# Altium PCB boost_converter_pcb_converter.PcbDoc
Units mil, origin at the board's own origin, x right, y up, seen from the top; angles counter-clockwise.
Board outline 2885.72 x 3790 mil, 2 copper layers (Top Layer, Bottom Layer); 26 components, 14 nets, 60 pads, 0 vias.
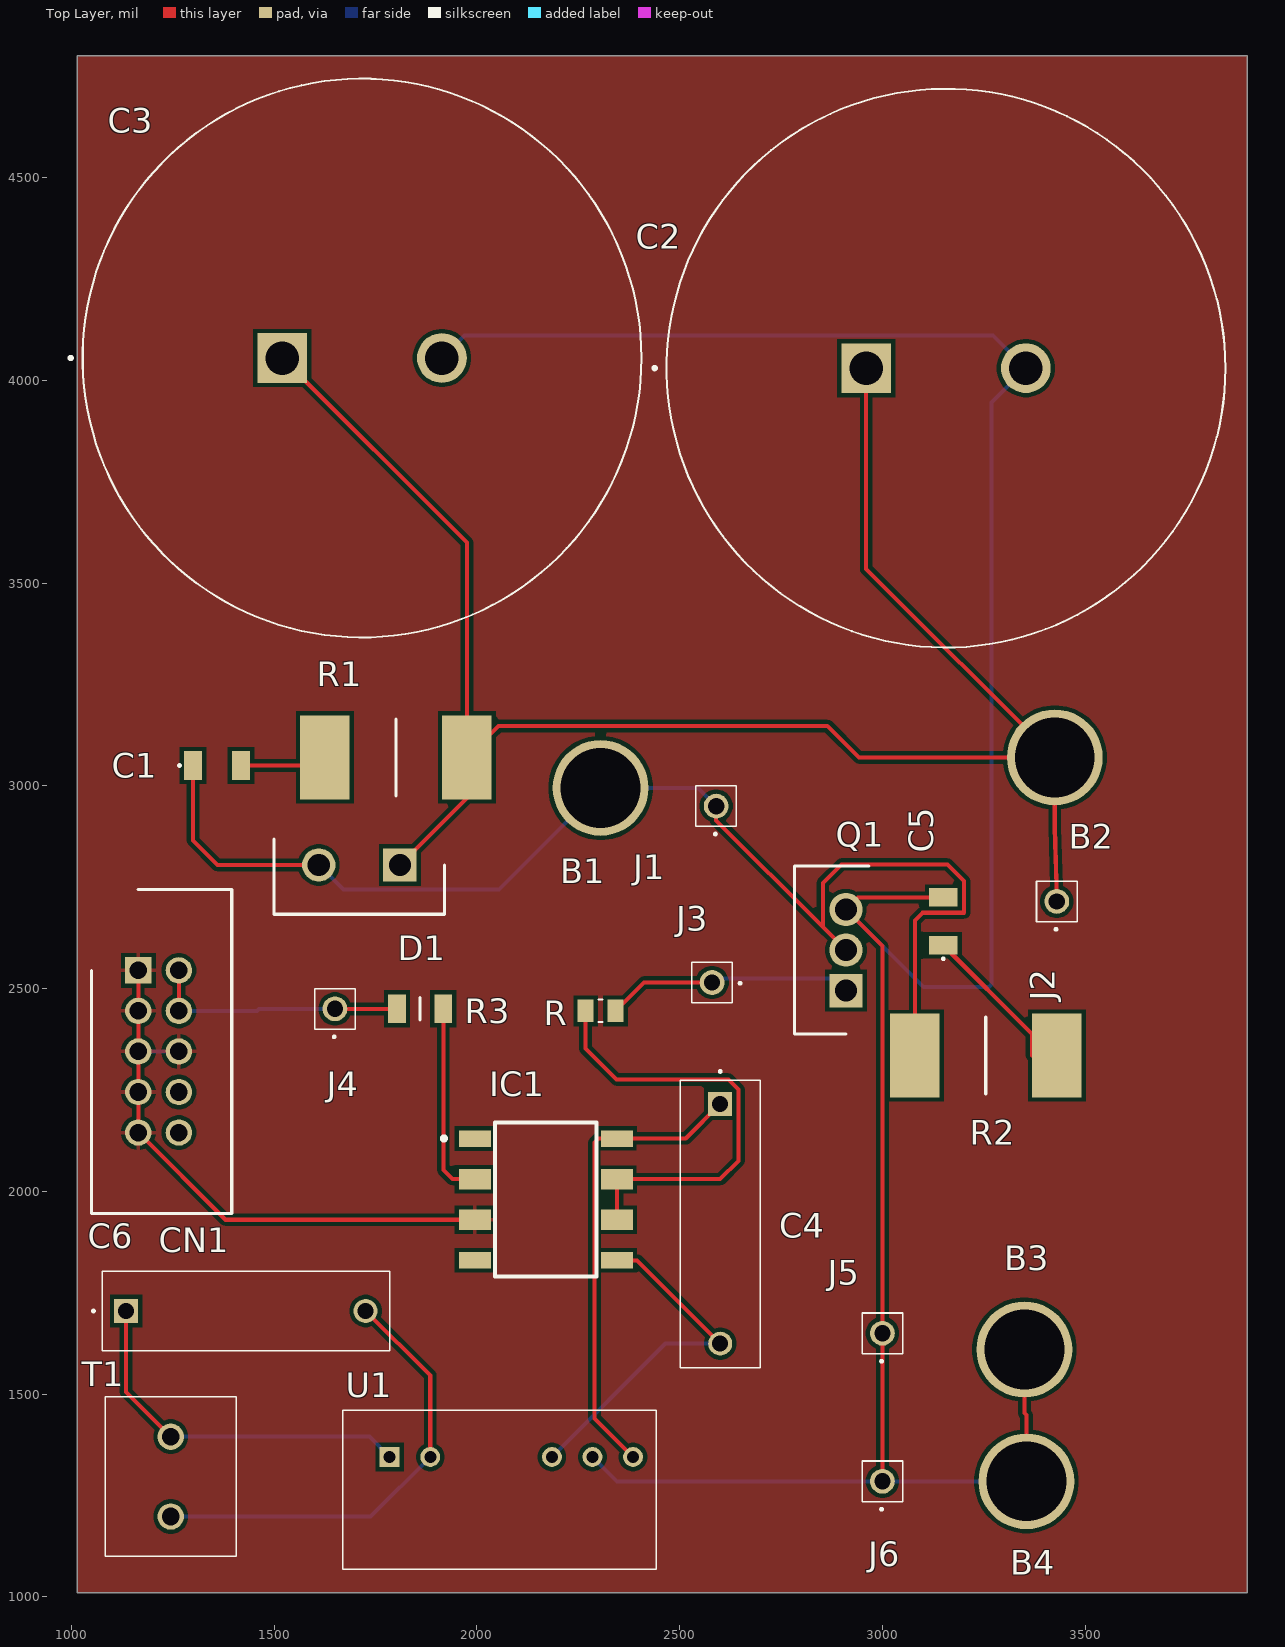
[diagram p0: Top Layer view]
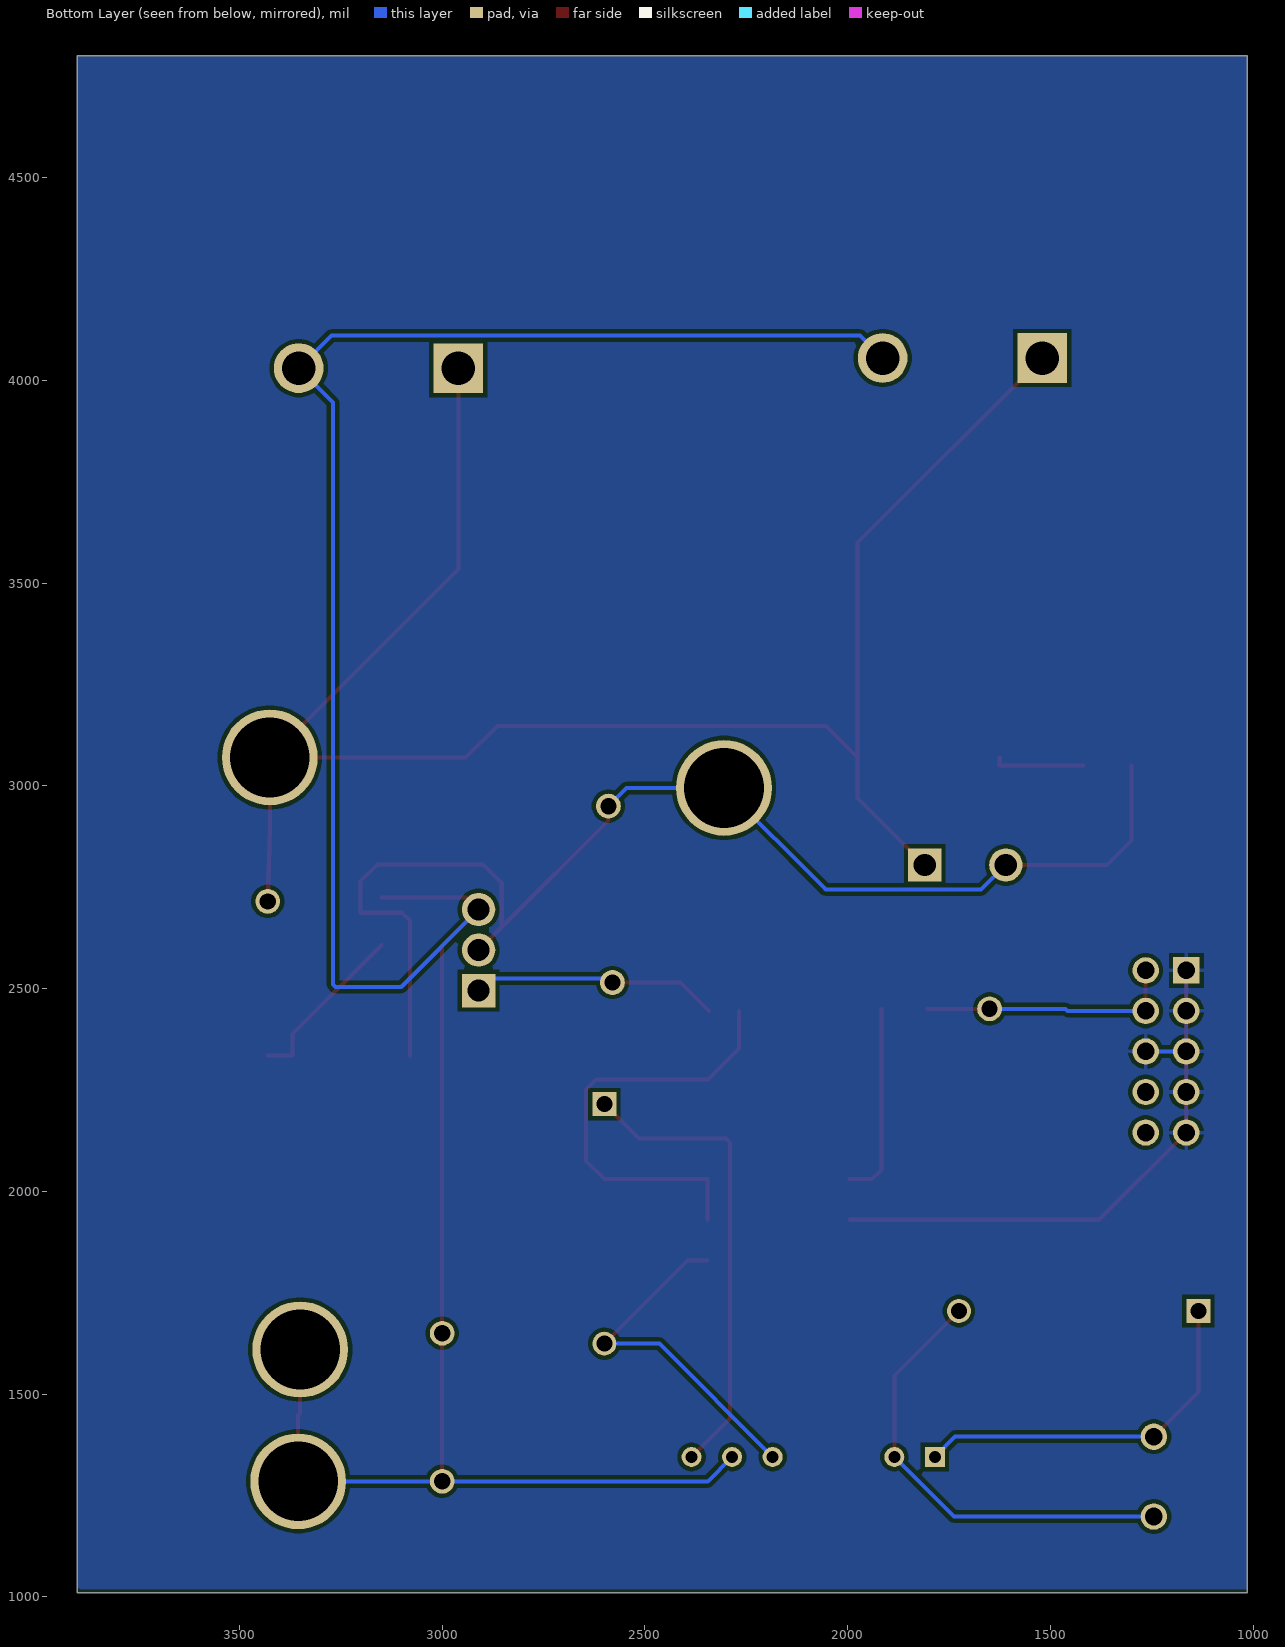
[diagram p1: Bottom Layer view, seen from below]
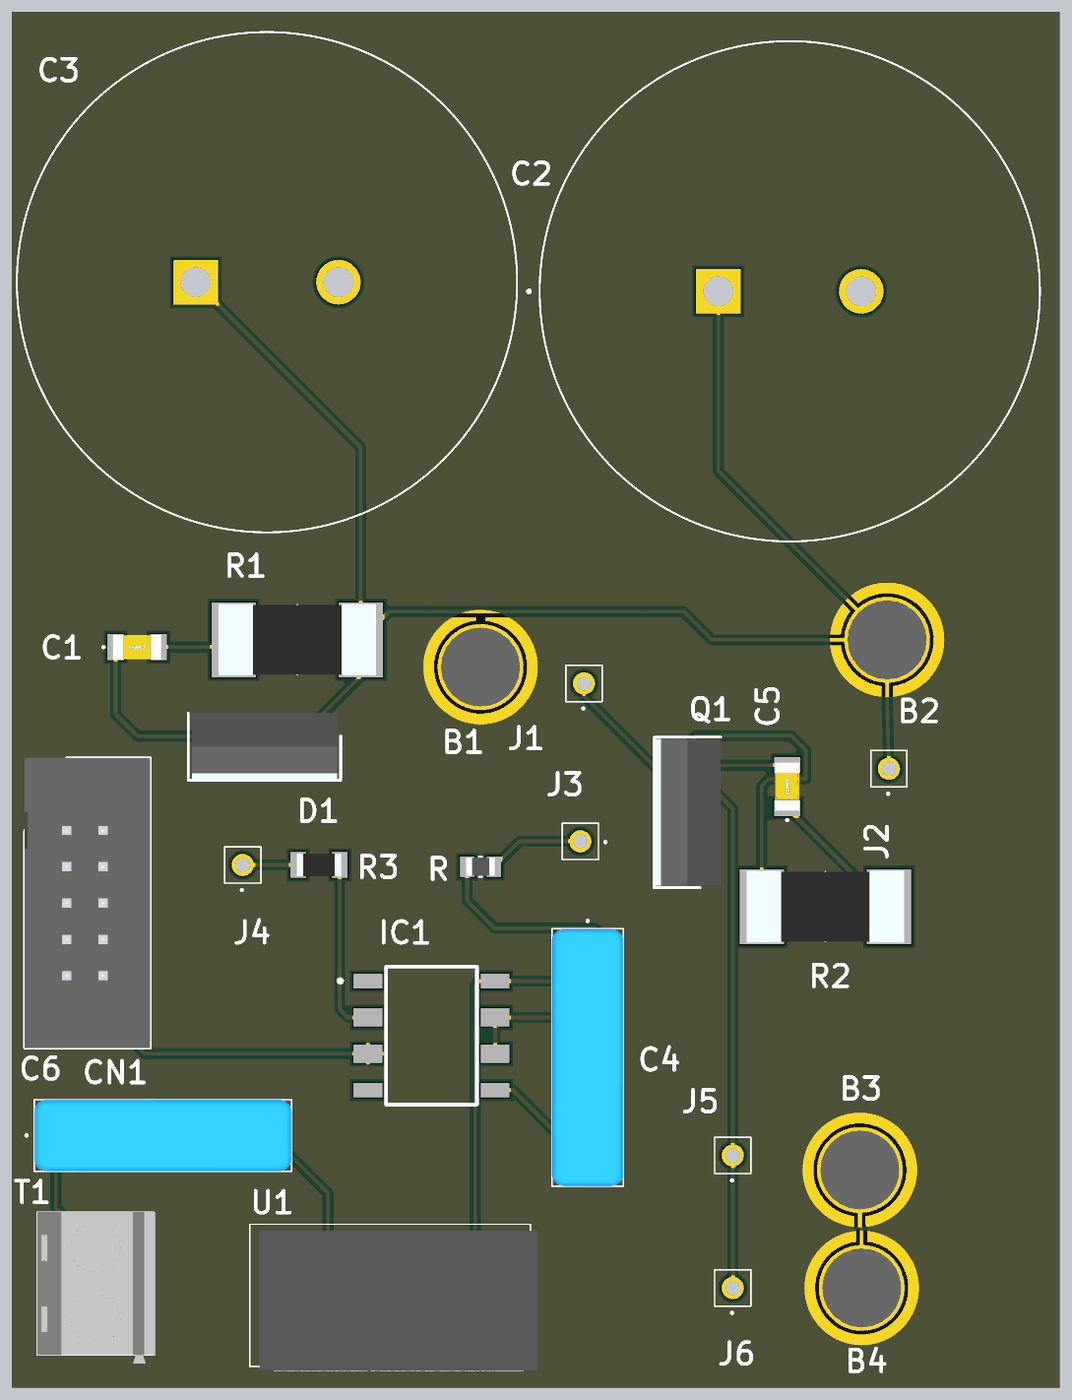
[diagram p2: 3D render of the assembled board from above, using the file's embedded part models]

## Layer stack, top to bottom
Top Solder: solder mask 0.4, Solder Resist, Dk 3.5
Top Layer: signal copper 1.4
Dielectric 1: dielectric 12.6, FR-4, Dk 4.8
Bottom Layer: signal copper 1.4
Bottom Solder: solder mask 0.4, Solder Resist, Dk 3.5

## Board outline
1014.28,1010 1014.28,4800 3900,4800 3900,1010

## Design rules (kind name [scope] priority, off if disabled: settings)
Clearance [All] p1: gap=10 ignorepadtopadclearanceinfootprint=FALSE
HoleSize [All] p1: absolutevalues=TRUE maxlimit=220 minlimit=1 maxpercent=80.000 minpercent=20.000
MinimumSolderMaskSliver [All] p1: minsoldermaskwidth=9
PolygonConnect [All] p1: connectstyle=Relief reliefconductorwidth=10 reliefentries=4 polygonreliefangle="90 Angle" airgapwidth=10
RoutingVias [All] p1: holewidth=28 width=50 viastyle="Through Hole" minholewidth=28 minwidth=50 maxholewidth=28 maxwidth=50
SilkToSilkClearance [All] p1: silktosilkclearance=7
SilkToSolderMaskClearance [IsPad] p1: minsilkscreentomaskgap=3 clearancetoexposedcopper=TRUE
SolderMaskExpansion [All] p1: expansion=4 istentingtop=FALSE
Width [All] p1: maxlimit=10 minlimit=10 preferedwidth=10
26 further rules are at their usual default settings.

## Components (designator, comment, footprint, x,y, rotation, side; value= is the part's Value field where it differs from the comment)
B1 "banana_jack" banana_connector 2305,2995 r0 top
B2 "banana_jack" banana_connector 3425,3070 r0 top
B3 "banana_jack" banana_connector 3350,1610 r0 top
B4 "banana_jack" banana_connector 3355,1285 r0 top
C1 "C1206C104K5RACTU" C1206 1359.06,3050 r0 top value=100nF
C2 "B43541A7337M000" CAP_B43641A9108M057 3156.85,4030 r0 top value=330µF
C3 "B43541A7337M000" CAP_B43641A9108M057 1716.85,4055 r0 top value=330µF
C4 "B32652A2102J000" B32652_(18_x_5) 2600,2215 r270 top value=1nF
C5 "C1206C104K5RACTU" C1206 3150,2665.95 r90 top value=100nF
C6 "B32652A2102J000" B32652_(18_x_5) 1135,1705 r0 top value=1nF
CN1 "30310-6002HB" SHDR10W64P254_2X5_2030X878X930P 1165,2545 r270 top
D1 "LQA10T300" TO508P470X1016X2215-2P 1810,2805 r180 top
IC1 "HCPL-3120-300E" HCPL-3120-GULL-WING 2170,1980 r270 top
J1 "TSW-101-07-G-S" TSW-101-XX-YY-S 2590,2950 r0 top
J2 "TSW-101-07-G-S" TSW-101-XX-YY-S 3430,2715 r0 top
J3 "TSW-101-07-G-S" TSW-101-XX-YY-S 2580,2515 r90 top
J4 "TSW-101-07-G-S" TSW-101-XX-YY-S 1650,2450 r0 top
J5 "TSW-101-07-G-S" TSW-101-XX-YY-S 3000,1650 r0 top
J6 "TSW-101-07-G-S" TSW-101-XX-YY-S 3000,1285 r0 top
Q1 "IRF740APBF" TO254P465X1024X2050-3P 2910,2495 r90 top
R "CRCW080510R0FKEAHP" RESC2012X60N 2305,2445 r0 top value=10
R1 "355010RFT" RESC11050X120N 1800.2,3070 r0 top
R2 "355010RFT" RESC11050X120N 3255,2335 r0 top
R3 "CRCW1206499RFKEAHP" RESC3116X65N 1860,2450 r0 top
T1 "282836-2" 2828362 1245,1395 r90 top
U1 "MGJ2D242005SC" MURATA-MGJ2 1785,1345 r0 top

## Footprints (in the part's own frame and the unit in brackets; to place one, negate y for a bottom-side part, rotate by r counter-clockwise, add the part's x,y. Pads: shape width x height; smd on the part's side, far side on the other; paste and mask are expansions set on the pad)
2828362 [mm]
  round 1.65 hole 1.1: 1(0,0) 2(-5,0)
  silkscreen extent -7.5,-4.1 2.5,4.1, body extent -8.09,-4.1 2.51,4.1, height 10.02
B32652_(18_x_5) [mm]
  rect 1.5x1.5 hole 1: 1(0,0)
  round 1.5 hole 1: 2(15,0)
  silkscreen extent -2.1,-2.5 16.5,2.5, body extent -1.5,-2.5 16.5,2.5, height 11
banana_connector [mm]
  round 6 hole 5 paste-2539.97 mask+1: B?(0,0)
  body extent -2.76,-2.77 2.76,2.77, height 6.76
C1206 [mm]
  rect 1.15x1.8 smd: 1(-1.5,0) 2(1.5,0)
  silkscreen extent -2.4,-0.05 -2.3,0.05, body extent -1.7,-0.9 1.7,0.9, height 1.75
CAP_B43641A9108M057 [mm]
  rect 3.116x3.116 hole 2.1: 1(-5,0)
  round 3.116 hole 2.1: 2(5,0)
  silkscreen extent -18.35,-17.5 17.5,17.5
HCPL-3120-GULL-WING [mm]
  rect 1.016x2 smd: 1(-3.81,-4.45) 4(3.81,-4.45) 5(3.81,4.45) 8(-3.81,4.45)
  rect 1.27x2 smd: 2(-1.27,-4.45) 3(1.27,-4.45) 6(1.27,4.45) 7(-1.27,4.45)
  silkscreen extent -4.82,-6.51 4.82,3.18
MURATA-MGJ2 [mm]
  rect 1.25x1.25 hole 0.75: 1(0,0)
  round 1.25 hole 0.75: 2(2.54,0) 5(10.16,0) 6(12.7,0) 7(15.24,0)
  silkscreen extent -2.95,-7.02 16.7,2.93, body extent -2.28,-7.32 17.22,2.5, height 12.85
RESC2012X60N [mm]
  rect 1x1.42 smd: 1(-0.935,0) 2(0.935,0)
  silkscreen extent -0.12,-0.7 0.12,0.7, body extent -1,-0.63 1,0.63, height 0.6
RESC3116X65N [mm]
  rect 1.1x1.8 smd: 1(-1.45,0) 2(1.45,0)
  silkscreen extent 0,-0.7 0,0.7, body extent -1.55,-0.8 1.55,0.8, height 0.65
RESC11050X120N [mm]
  rect 3.1x5.25 smd: 1(-4.45,0) 2(4.45,0)
  silkscreen extent 0,-2.4 0,2.4, body extent -5.5,-2.5 5.5,2.5, height 1.2
SHDR10W64P254_2X5_2030X878X930P [mm]
  rect 1.65x1.65 hole 1.1: 1(0,0)
  round 1.65 hole 1.1: 2(0,2.54) 3(2.54,0) 4(2.54,2.54) 5(5.08,0) 6(5.08,2.54) 7(7.62,0) 8(7.62,2.54) 9(10.16,0) 10(10.16,2.54)
  silkscreen extent -5.07,-2.93 15.23,5.85, body extent -5.07,-2.93 15.23,5.85, height 9.3
TO254P465X1024X2050-3P [mm]
  rect 2.085x2.085 hole 1.39: 1(0,0)
  round 2.085 hole 1.39: 2(2.54,0) 3(5.08,0)
  silkscreen extent -2.72,-1.42 7.8,3.22, body extent -2.58,-1.43 7.66,3.22, height 18.77
TO508P470X1016X2215-2P [mm]
  rect 2.085x2.085 hole 1.39: 1(0,0)
  round 2.085 hole 1.39: 2(5.08,0)
  silkscreen extent -2.8,-1.61 7.88,3.09, body extent -2.54,-1.61 7.62,3.1, height 22.15
TSW-101-XX-YY-S [mm]
  round 1.55 hole 1.02: 1(0,0)
  silkscreen extent -1.27,-1.8 1.27,1.27

## Part data
B1 B2 B3 B4: library part CMP-037-000000-1, Component Type=Standard, Design Item ID=banana_jack, Pin Count=1, Source=Schlib1.SchLib
C1 C5: library part CMP-001-00088-1, "Multilayer Ceramic  / Capacitors MLCC -  / SMD/SMT 50V  / 0.1uF X7R 1206  / 10%", Manufacturer_Name=KEMET, Mouser Part Number=80-C1206C104K5R, Arrow Part Number=C1206C104K5RACTU, Arrow Price/Stock=https://www.arrow.com/en/products/c1206c104k5ractu/kemet-corporation?region=nac, Component Type=Standard, Datasheet Link=https://content.kemet.com/datasheets/KEM_C1002_X7R_SMD.pdf, Design Item ID=C1206C104K5RACTU, Manufacturer_Part_Number=C1206C104K5RACTU, Mouser Price/Stock=https://www.mouser.co.uk/ProductDetail/KEMET/C1206C104K5RACTU?qs=VbFpUC1cecnmBMAUeCQCPw%3D%3D, Pins=2, Source=Schlib1.SchLib
C2 C3: library part CMP-001-00085-1, "Electrolytic Capacitor, 330 µF, 550 V, ± 20%, Snap-In, 5000 hours @ 85°C", Component Type=Standard, Design Item ID=B43541A7337M000, Pins=2, Source=Schlib1.SchLib
C4 C6: library part CMP-001-00084-1, "General Purpose Film Capacitor,  / Metallized PP, Radial Box - 2 Pin,  / 1000 pF, ± 5%, 700 V, 2 kV", Manufacturer_Name=TDK, Component Type=Standard, Datasheet Link=https://product.tdk.com/system/files/dam/doc/product/capacitor/film/mkp_mfp/data_sheet/20/20/db/fc_2009/mkp_b32651_658.pdf, Design Item ID=B32652A2102J000, Height=10.5mm, Manufacturer_Part_Number=B32652A2102J000, Pins=2, Source=Schlib1.SchLib
CN1: library part CMP-001-00083-1, "Connector", Manufacturer_Name=3M, Mouser Part Number=517-30310-6002, Arrow Part Number=30310-6002HB, Arrow Price/Stock=https://www.arrow.com/en/products/30310-6002hb/3m?region=europe, Component Type=Standard, Datasheet Link=http://multimedia.3m.com/mws/media/22504O/3mtm-100-in-loprof-hdr-100x-100strt-ra-4-wall-ts0818.pdf, Design Item ID=30310-6002HB, Height=9.3mm, Manufacturer_Part_Number=30310-6002HB, Mouser Price/Stock=https://www.mouser.co.uk/ProductDetail/3M-Electronic-Solutions-Division/30310-6002HB?qs=Z%252B4xWyzEAtfC1LW5U6u5VQ%3D%3D, Pins=10, Source=Schlib1.SchLib
D1: library part CMP-004-00031-1, "Diode", Manufacturer_Name="Power Integrations", Mouser Part Number=903-LQA10T300, Component Type=Standard, Datasheet Link=https://www.power.com/sites/default/files/documents/lqa10t300.pdf, Design Item ID=LQA10T300, Height=4.7mm, Manufacturer_Part_Number=LQA10T300, Mouser Price/Stock=https://www.mouser.co.uk/ProductDetail/Power-Integrations/LQA10T300?qs=GCmimEVns2r8uWm1K%2FNjDQ%3D%3D, Pins=2, Source=Schlib1.SchLib
IC1: library part CMP-031-00015-1, "Integrated Circuit", Manufacturer_Name="Avago Technologies", Mouser Part Number=630-HCPL-3120-300E, Component Type=Standard, Datasheet Link=https://datasheet.datasheetarchive.com/originals/distributors/Datasheets-DGA20/76472.pdf, Design Item ID=HCPL-3120-300E, Manufacturer_Part_Number=HCPL-3120-300E, Mouser Price/Stock=https://www.mouser.co.uk/ProductDetail/Broadcom-Avago/HCPL-3120-300E?qs=s%252BgfxR24RQ6TPIBx%252BV5Caw%3D%3D, Pins=8, Source=Schlib1.SchLib
J1 J2 J3 J4 J5 J6: library part CMP-002-00074-1, "Connector", Manufacturer_Name=SAMTEC, Mouser Part Number=200-TSW10107GS, Arrow Part Number=TSW-101-07-G-S, Arrow Price/Stock=https://www.arrow.com/en/products/tsw-101-07-g-s/samtec?region=europe, Component Type=Standard, Datasheet Link=http://suddendocs.samtec.com/prints/tsw-xxx-xx-xxx-x-xx-xxx-mkt.pdf, Design Item ID=TSW-101-07-G-S, Manufacturer_Part_Number=TSW-101-07-G-S, Mouser Price/Stock=https://www.mouser.co.uk/ProductDetail/Samtec/TSW-101-07-G-S?qs=hzq9O0YpnZscfPe5oPvABA%3D%3D, Pins=1, Source=Schlib1.SchLib
Q1: library part CMP-037-000003-1, "MOSFET (N-Channel)", Manufacturer_Name=Vishay, Mouser Part Number=844-IRF740APBF, Arrow Part Number=IRF740APBF, Arrow Price/Stock=https://www.arrow.com/en/products/irf740apbf/vishay?region=europe, Component Type=Standard, Datasheet Link=https://www.vishay.com/docs/91051/91051.pdf, Design Item ID=IRF740APBF, Height=4.65mm, Manufacturer_Part_Number=IRF740APBF, Mouser Price/Stock=https://www.mouser.co.uk/ProductDetail/Vishay-Semiconductors/IRF740APBF?qs=cvaI6ThkwxvN0fUna9PDCg%3D%3D, Pin Count=3, Source=Schlib1.SchLib
R: library part CMP-009-00179-1, "10 Ohms Â±1% 0.5W, 1/2W Chip Resistor 0805 (2012 Metric) Automotive AEC-Q200, Pulse Withstanding Thick Film", Case/Package="2012 Bourns", Availability=Unavailable, Component Type=Standard, Design Item ID=CRCW080510R0FKEAHP, DigiKey-Purchase-URL=https://snapeda.com/shop?store=DigiKey&id=984116, MF=Vishay, MP=CRCW080510R0FKEAHP, Pins=2, Price=None, SnapEDA_Link=https://www.snapeda.com/parts/CRCW080510R0FKEAHP/Vishay%20Dale/view-part/984116/?ref=snap, Source=Schlib1.SchLib
R1 R2: library part CMP-009-00177-1, "Resistor", Manufacturer_Name="TE Connectivity", Mouser Part Number=279-355010RFT, Component Type=Standard, Datasheet Link=https://componentsearchengine.com/Datasheets/2/355010RFT.pdf, Design Item ID=355010RFT, Height=1.2mm, Manufacturer_Part_Number=355010RFT, Mouser Price/Stock=https://www.mouser.co.uk/ProductDetail/TE-Connectivity-Holsworthy/355010RFT?qs=gZXFycFWdAMXqTpjOt4N5g%3D%3D, Pins=2, Source=Schlib1.SchLib
R3: "Resistor", Manufacturer_Name=Vishay, Mouser Part Number=71-CRCW1206499RFKEAH, Arrow Part Number=CRCW1206499RFKEAHP, Arrow Price/Stock=https://www.arrow.com/en/products/crcw1206499rfkeahp/vishay, Height=0.65mm, Manufacturer_Part_Number=CRCW1206499RFKEAHP, Mouser Price/Stock=https://www.mouser.com/Search/Refine.aspx?Keyword=71-CRCW1206499RFKEAH
T1: library part CMP-012-00000-1, "Connector", Manufacturer_Name="TE Connectivity", Mouser Part Number=571-2828362, Arrow Part Number=282836-2, Arrow Price/Stock=https://www.arrow.com/en/products/282836-2/te-connectivity?region=europe, Component Type=Standard, Datasheet Link=https://www.te.com/commerce/DocumentDelivery/DDEController?Action=showdoc&DocId=Customer+Drawing%7F282836%7FJ%7Fpdf%7FEnglish%7FENG_CD_282836_J.pdf%7F282836-2, Design Item ID=282836-2, Height=10mm, Manufacturer_Part_Number=282836-2, Mouser Price/Stock=https://www.mouser.co.uk/ProductDetail/TE-Connectivity/282836-2?qs=A%252Bip%252BNCYi6Ohx9vaQ1l4dg%3D%3D, Pins=2, Source=Schlib1.SchLib
U1: library part CMP-037-000006-1, "Undefined or Miscellaneous", Manufacturer_Name="Murata Electronics", Mouser Part Number=580-MGJ2D242005SC, Arrow Part Number=MGJ2D242005SC, Arrow Price/Stock=https://www.arrow.com/en/products/mgj2d242005sc/murata-power-solutions?region=nac, Component Type=Standard, Datasheet Link=http://power.murata.com/data/power/ncl/kdc_mgj2.pdf, Design Item ID=MGJ2D242005SC, Manufacturer_Part_Number=MGJ2D242005SC, Mouser Price/Stock=https://www.mouser.co.uk/ProductDetail/Murata-Power-Solutions/MGJ2D242005SC?qs=xLDY6iXSiQZFsrjCzeaXXw%3D%3D, Pin Count=5, Source=Schlib1.SchLib

## Nets (pads, with @x,y where several pads share a name; then routed paths per layer and width w, separated by ;. In a path a pad name is that pad's centre, name@x,y a point inside that pad or via, vN(x,y) a via of type N, cw(c..) or ccw(c..) an arc to the next point about the centre after c; other vN are vias at no path point)
+Vin: C6.1 T1.1 U1.1 | length 916.3
  Top Layer w10: C6.1 1135,1505 T1.1
  Bottom Layer w10: T1.1 1735,1395 U1.1
-Vin: C6.2 T1.2 U1.2 | length 1126.9
  Top Layer w10: C6.2 1885,1545.55 U1.2
  Bottom Layer w10: T1.2 1738.15,1198.15 U1.2
DGND: CN1.1 CN1.3 CN1.5 CN1.6 CN1.7 CN1.9 IC1.3 | length 1418.9
  Top Layer w10: CN1.1 CN1.3 CN1.5 CN1.7 CN1.9 1380,1930 IC1.3
  Bottom Layer w10: CN1.5 CN1.6
NetB1_B?: B1.B? C1.1 D1.2 J1.1 Q1.2 R2.1 | length 3167.3
  Top Layer w10: C1.1 1300,2865 1360,2805 D1.2 ; J1.1 2590,2915 2853,2652 ; Q1.2 2853,2652 ; R2.1 3079.8,2667.8 3099,2687 3201,2687 3201,2765 3160,2806 2899,2806 2853,2760 2853,2652
  Bottom Layer w10: D1.2 1671,2744 2054,2744 B1.B? 2545,2995 J1.1
NetB2_B?: B2.B? C2.1 C3.1 D1.1 J2.1 R1.2 | length 4529
  Top Layer w10: C3.1 1975.39,3599.61 R1.2 ; D1.1 1975.39,2970.39 R1.2 ; C2.1 2960,3535 B2.B? ; J2.1 3425,2898 B2.B? ; R1.2 2053.39,3148 2864,3148 2942,3070 B2.B?
NetB3_B?: B3.B? B4.B? C2.2 C3.2 C5.2 J5.1 J6.1 Q1.3 U1.6 | length 6614
  Top Layer w10: J6.1 J5.1 3000,2605 Q1.3 2940,2725 C5.2 ; B3.B? 3350,1453 3355,1448 B4.B?
  Bottom Layer w10: C3.2 1969.7,4111 3272.7,4111 C2.2 3269.15,3945.45 3269.15,2510.01 3263.29,2504.15 3100.85,2504.15 Q1.3 ; U1.6 2345,1285 J6.1 B4.B?
NetC1_2: C1.2 R1.1 | length 226.9
  Top Layer w10: C1.2 1625,3050 R1.1
NetC4_1: C4.1 IC1.8 U1.7 | length 1163.7
  Top Layer w10: U1.7 2290,1440 2290,2120 2300,2130 IC1.8 2515,2130 C4.1
NetC4_2: C4.2 IC1.5 U1.5 | length 870.7
  Top Layer w10: IC1.5 2394.45,1830 C4.2
  Bottom Layer w10: U1.5 2464.45,1624.45 C4.2
NetC5_1: C5.1 R2.2 | length 423.8
  Top Layer w10: C5.1 3369,2387.89 3369,2335 R2.2
NetCN1_2: CN1.2 CN1.4 J4.1 R3.1 | length 640
  Top Layer w10: CN1.4 CN1.2 ; J4.1 R3.1
  Bottom Layer w10: CN1.4 1458,2445 1463,2450 J4.1
NetIC1_2: IC1.2 R3.2 | length 484.3
  Top Layer w10: R3.2 1917.09,2052.91 1940,2030 IC1.2
NetIC1_6: IC1.6 IC1.7 R.1 | length 1106.2
  Top Layer w10: R.1 2268.19,2351.81 2344,2276 2620,2276 2645,2251 2645,2075 2600,2030 IC1.7 IC1.6
NetJ3_1: J3.1 Q1.1 R.2 | length 613.8
  Top Layer w10: R.2 2411.81,2515 J3.1
  Bottom Layer w10: J3.1 2589.76,2524.76 2611.13,2524.76 2611.37,2525 2880,2525 Q1.1
pads on no net: CN1.8 CN1.10 IC1.1 IC1.4

## Polygon pours and split planes (outlines as drawn)
DGND on Top Layer "DGND_L01_P000" (solid, pour order 0): 1011.34,4805.12 1014.67,4801.79 3899.79,4801.79 3899.79,1014.34 3895.45,1010 1014.28,1010 1014.28,4796.26 1015.61,4797.59
DGND on Bottom Layer "DGND_L02_P002" (solid, pour order 2): 1014.28,4800 3900,4800 3900,1010 3891.74,1018.26 1014.28,1018.26

## Silkscreen, mask and mechanical layers (free items; w line width, h text height)
Mechanical 1:
  the board outline again, w10